# Altium PCB PCB_AIO.PcbDoc
Units mil, origin at the board's own origin, x right, y up, seen from the top; angles counter-clockwise.
Board outline 3925 x 3600.59 mil, 2 copper layers (Top Layer, Bottom Layer), stack 12.8 mil thick; 112 components, 94 nets, 470 pads, 120 vias.
Unrouted connection lines stored in the file: 86.
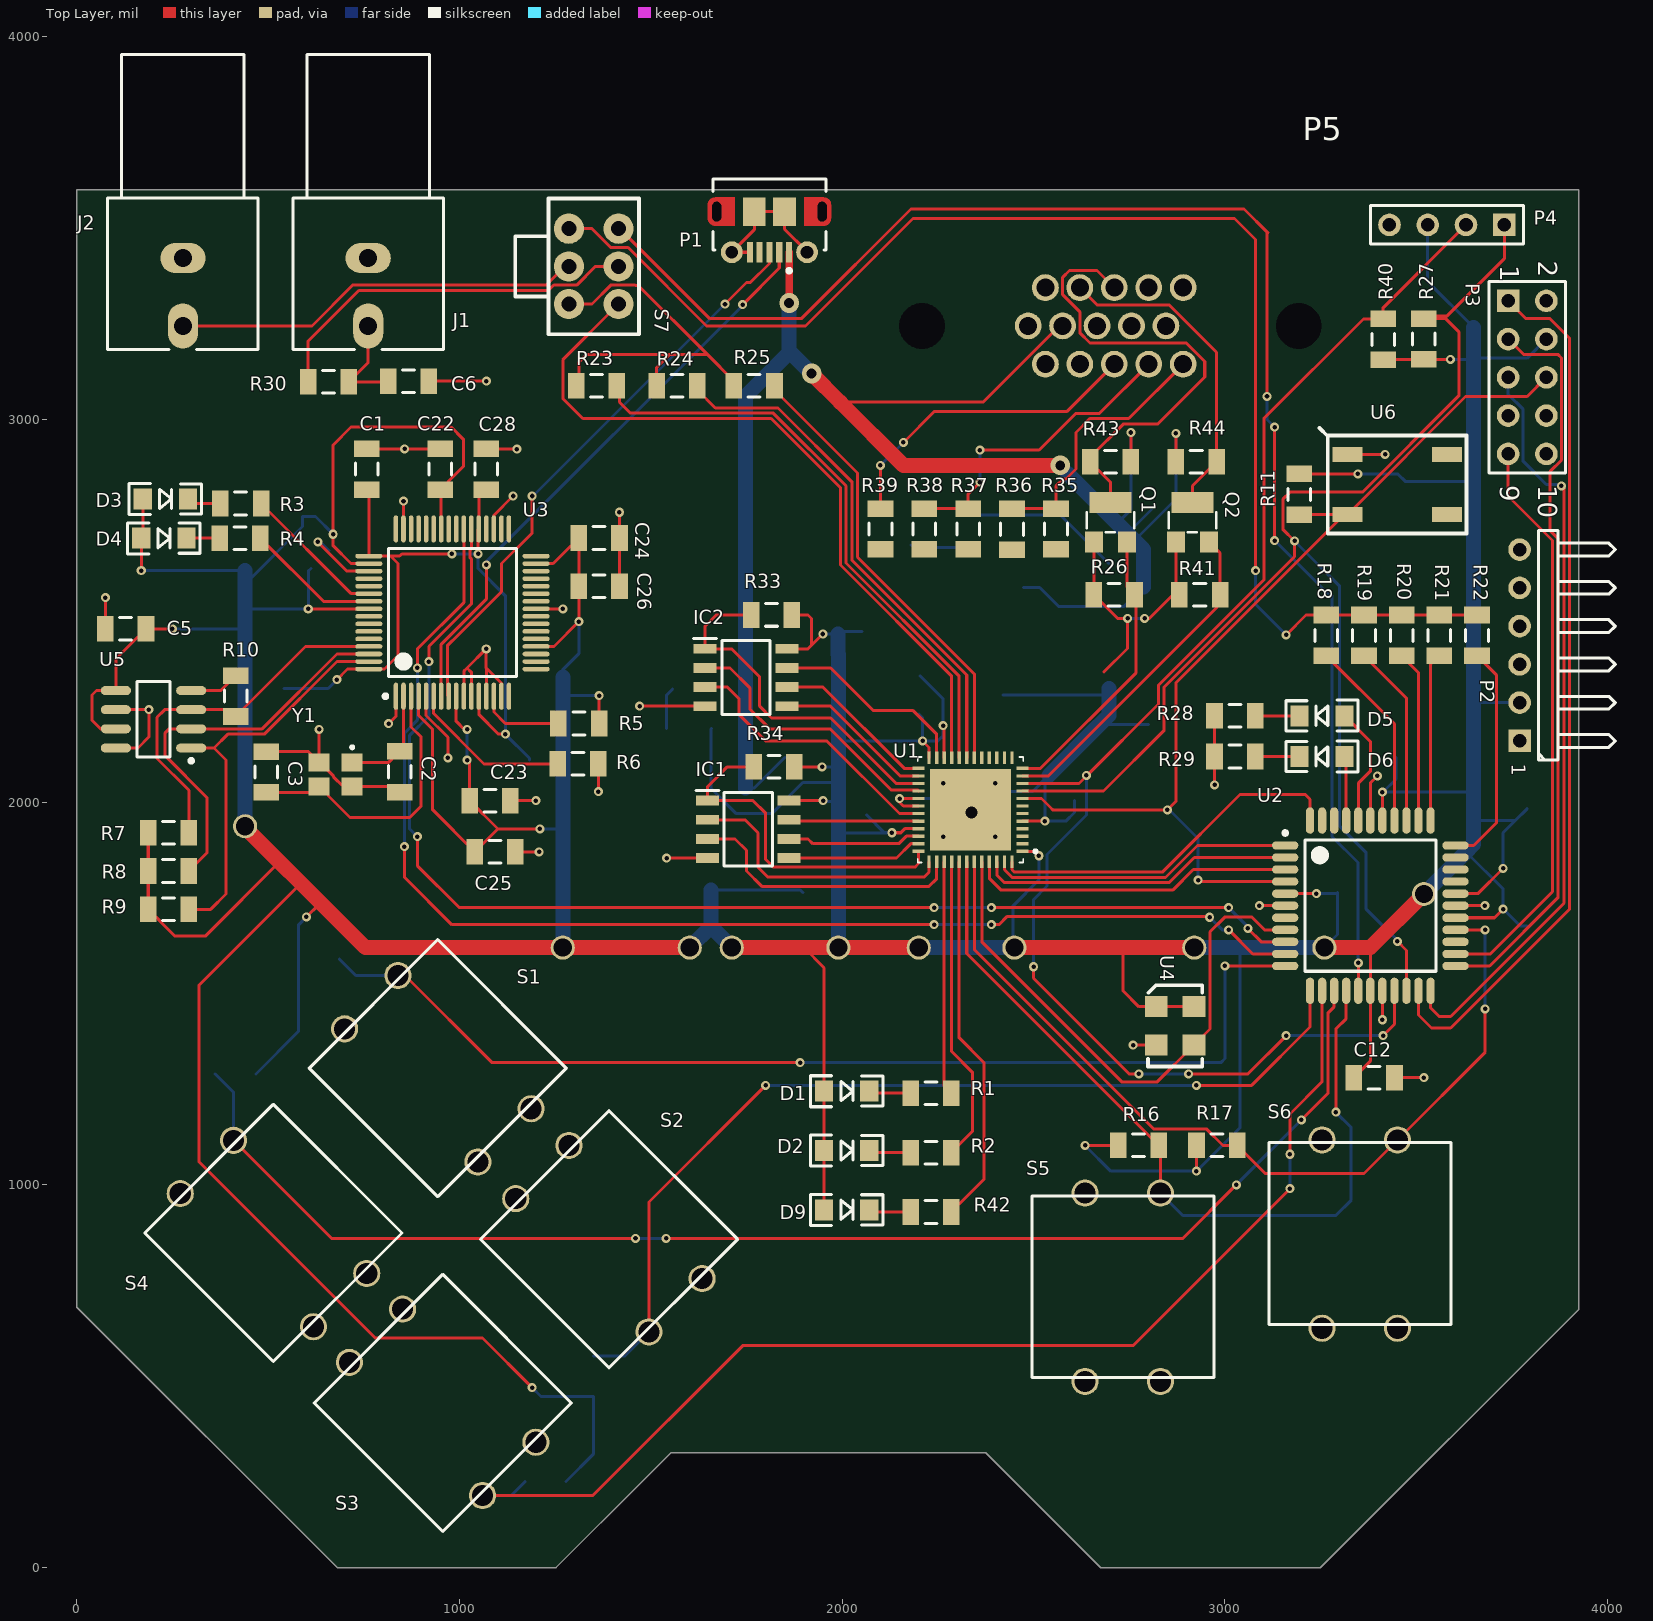
[diagram p0: Top Layer view]
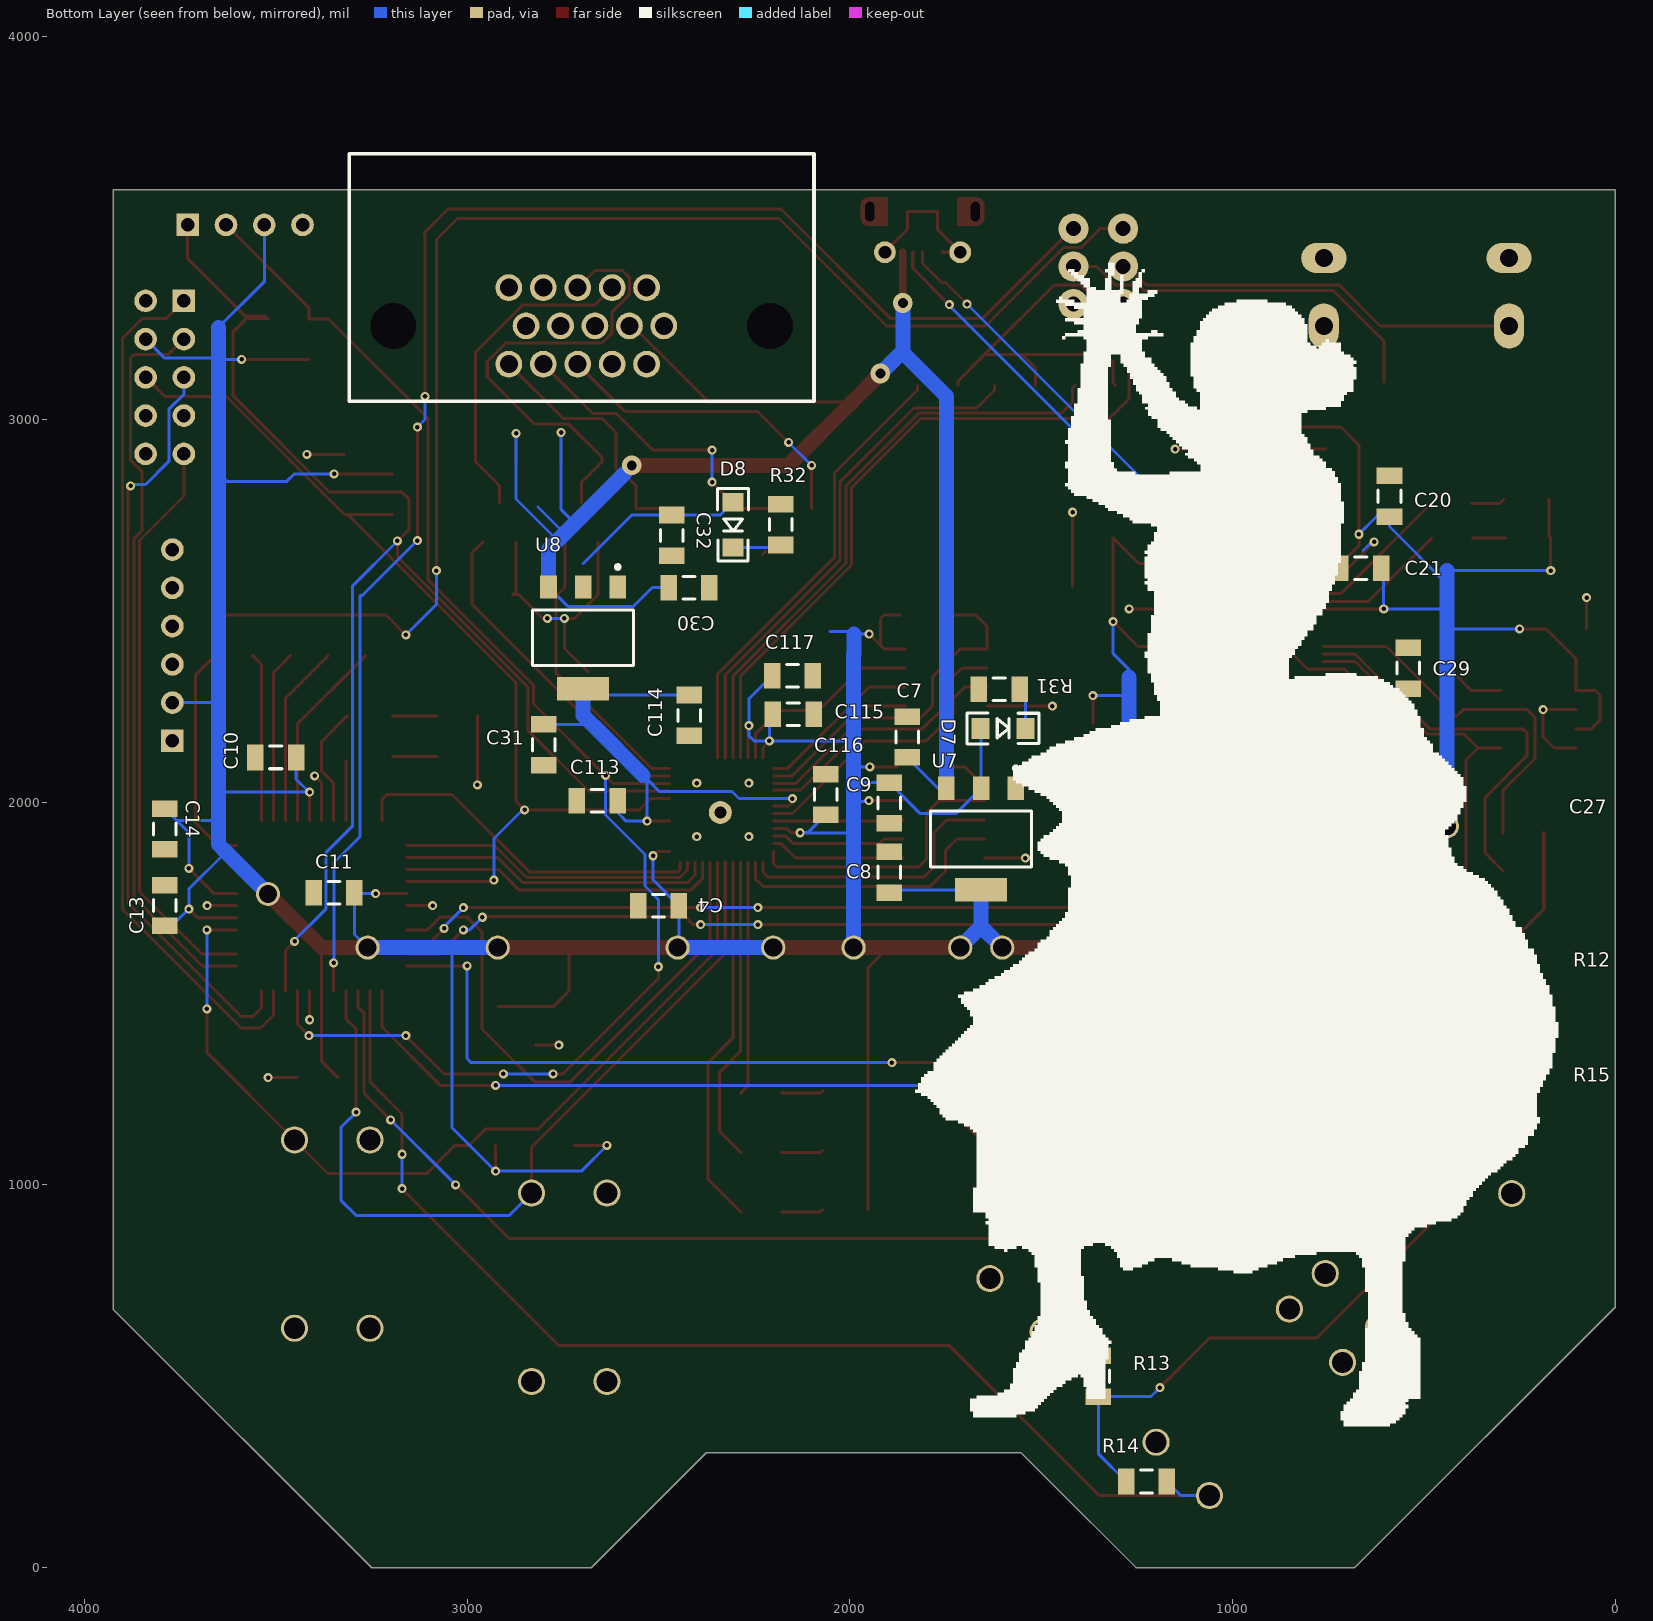
[diagram p1: Bottom Layer view, seen from below]

## Layer stack, top to bottom
Top Solder: solder mask 0.4, Solder Resist, Dk 3.5
Top Layer: signal copper 1.4
Dielectric 1: core 10, FR-4, Dk 4.2
Bottom Layer: signal copper 1.4
Bottom Solder: solder mask 0.4, Solder Resist, Dk 3.5

## Board outline
680.51,0 0,680.51 0,3600 3925,3600 3925,675 3249.41,-0.59 2675.59,-0.59 2375,300 1552.56,300 1484.25,231.69 1252.56,0
cut-out: 0,700

## Design rules (kind name [scope] priority, off if disabled: settings)
AssemblyTestpoint [All] p1: testpointundercomponent=TRUE minsize=39.37 maxsize=98.43 preferedsize=59.06 minholesize=0 maxholesize=40 preferedholesize=31.5 testpointgrid=1 usegrid=TRUE gridtolerance=0.01 allowsidetop=TRUE allowsidebottom=TRUE
Clearance [All] p1: gap=5.91 ignorepadtopadclearanceinfootprint=FALSE except(0: Arc-Hole Track-Hole SMDPad-Hole THPad-Hole Via-Hole Fill-Hole Poly-Hole Region-Hole Text-Hole; 11.81: Arc-Poly Track-Poly SMDPad-Poly THPad-Poly Via-Poly Fill-Poly Poly-Poly)
FabricationTestpoint [All] p1: side=3 testpointundercomponent=TRUE minsize=39.37 maxsize=100 preferedsize=59.06 minholesize=0 maxholesize=40 preferedholesize=31.5 testpointgrid=1 allowsidetop=TRUE allowsidebottom=TRUE usegrid=TRUE gridtolerance=0.01
HoleSize [All] p1: absolutevalues=TRUE maxlimit=157.48 minlimit=11.81 maxpercent=80.000 minpercent=20.000
HoleToHoleClearance [All] p1: gap=7.87 allowstackedmicrovias=TRUE
MinimumSolderMaskSliver [All] p1: minsoldermaskwidth=0.98
PlaneClearance [All] p1: clearance=15.75
PlaneConnect [All] p1: planeconnectstyle=Relief reliefexpansion=15.75 reliefentries=4 reliefconductorwidth=9.84 reliefairgap=7.87
PolygonConnect [All] p1: connectstyle=Relief reliefconductorwidth=9.84 reliefentries=4 polygonreliefangle="90 Angle" airgapwidth=9.84
RoutingVias [All] p1: holewidth=11.81 width=23.62 viastyle="Through Hole" minholewidth=11.81 minwidth=23.62 maxholewidth=19.68 maxwidth=39.37
SilkToSilkClearance [All] p1: silktosilkclearance=7.87
SilkToSolderMaskClearance [IsPad] p1: minsilkscreentomaskgap=1.97 clearancetoexposedcopper=TRUE
SolderMaskExpansion [All] p1: expansion=4
Width [All] p1: maxlimit=39.37 minlimit=5.91 preferedwidth=7.87
21 further rules are at their usual default settings.

## Classes and differential pairs
component class Arriquitaun2: C1 C2 C3 C5 C6 C7 C8 C9 C10 C11 C12 C13 C14 C20 C21 C22 C23 C24 C25 C26 C27 C28 C29 C30 C31 C32 C113 C114 C115 C116 C117 D3 D4 D7 D8 J1 J2 J3 P1 P2 P3 P4 R3 R4 R5 R6 R7 R8 R9 R10 R27 R30 R31 R32 R40 S7 U3 U5 U7 U8 Y1
component class Arriquitaun: C4 D1 D2 D5 D6 D9 IC1 IC2 P5 Q1 Q2 R1 R2 R11 R12 R13 R14 R15 R16 R17 R18 R19 R20 R21 R22 R23 R24 R25 R26 R28 R29 R33 R34 R35 R36 R37 R38 R39 R41 R42 R43 R44 S1 S2 S3 S4 S5 S6 U1 U2 U4 U6

## Components (designator, comment, footprint, x,y, rotation, side; value= is the part's Value field where it differs from the comment)
C1 "Cap Pol1" C1206 757.68,2870 r90 top
C2 "Cap Semi" C1206 843.74,2079.48 r270 top
C3 "Cap Semi" C1206 495.31,2078.99 r270 top
C4 "Cap Semi" C1206 2500,1729.48 r180 bottom
C5 "Cap Semi" C1206 127.8,2452.76 r0 top
C6 "Cap Semi" C1206 867.13,3100 r180 top
C7 "Cap Pol1" C1206 1850,2170 r90 bottom
C8 "Cap Pol1" C1206 1897.16,1816.97 r90 bottom
C9 "Cap Semi" C1206 1897.16,1998.07 r90 bottom
C10 "Cap Semi" C1206 3500,2116.85 r180 bottom
C11 "Cap Semi" C1206 3347.56,1763.82 r180 bottom
C12 "Cap Semi" C1206 3390,1280 r180 top
C13 "Cap Semi" C1206 3790,1730 r270 bottom
C14 "Cap Semi" C1206 3790,1930 r90 bottom
C20 "Cap Semi" C1206 590,2799.41 r270 bottom
C21 "Cap Semi" C1206 665,2610.83 r180 bottom
C22 "Cap Semi" C1206 950,2870 r270 top
C23 "Cap Semi" C1206 1080,2004.04 r180 top
C24 "Cap Semi" C1206 1365,2690.16 r180 top
C25 "Cap Semi" C1206 1093.15,1870 r180 top
C26 "Cap Semi" C1206 1365,2564.29 r180 top
C27 "Cap Semi" C1206 1130,2110 r0 bottom
C28 "Cap Semi" C1206 1070,2870 r270 top
C29 "Cap Semi" C1206 541.18,2350 r270 bottom
C30 "Cap Pol1" C1206 2420,2560.72 r180 bottom
C31 "Cap Pol1" C1206 2800,2150 r270 bottom
C32 "Cap Semi" C1206 2465,2697.13 r90 bottom
C113 "Cap Semi" C1206 2660,2004.04 r180 bottom
C114 "Cap Semi" C1206 2420,2226.85 r90 bottom
C115 "Cap Semi" C1206 2147.81,2230 r0 bottom
C116 "Cap Semi" C1206 2063.33,2020 r270 bottom
C117 "Cap Semi" C1206 2150,2330 r0 bottom
D1 "5988210107F" "1206 - LED" 2011.77,1245.19 r0 top
D2 "5988210107F" "1206 - LED" 2011.77,1090.01 r0 top
D3 "5988210107F" "1206 - LED" 231.61,2792.2 r0 top
D4 "5988210107F" "1206 - LED" 227.68,2689.84 r0 top
D5 "5988210107F" "1206 - LED" 3253.82,2225.59 r180 top
D6 "5988210107F" "1206 - LED" 3253.82,2119.3 r180 top
D7 "5988210107F" "1206 - LED" 1599.8,2192.99 r180 bottom
D8 "5988210107F" "1206 - LED" 2305,2724.61 r270 bottom
D9 "5988210107F" "1206 - LED" 2011.77,934.84 r0 top
IC1 "IS62WVS2568FBLL-20NLI" SOIC127P600X175-8N 1754.85,1929.04 r0 top
IC2 "AT25SF041-SSHD-T" SOIC127P600X175-8N 1748.46,2325.72 r0 top
J1 "RCA" RCA/4.5-H2 761.57,3578.94 r90 top
J2 "RCA" RCA/4.5-H2 277.32,3578.94 r90 top
P1 "47346-0001" USB-MICRO-B_V 1810,3490 r180 top
P2 "Header 6H" HDR1X6H 3770,2160 r90 top
P3 "Header 5X2" HDR2X5 3740,3310 r270 top
P4 "Header 4" HDR1X4 3730,3508.43 r180 top
P5 "L77HDE15SD1CO" DVI-15 2700.96,3244.45 r180 top
Q1 "BSS138P" *SOT23-W 2700.96,2731.3 r0 top
Q2 "BSS138P" *SOT23-W 2915.39,2731.3 r0 top
R1 "Res3" c1206 2231.85,1239.55 r180 top
R2 "Res3" c1206 2231.85,1084.38 r180 top
R3 "Res3" c1206 428.46,2780.39 r180 top
R4 "Res3" c1206 426.5,2689.84 r180 top
R5 "Res3" c1206 1311.85,2205.47 r180 top
R6 "Res3" c1206 1310,2100 r0 top
R7 "Res3" c1206 240,1920.08 r180 top
R8 "Res3" c1206 240,1820.08 r180 top
R9 "Res3" c1206 240,1720.08 r180 top
R10 "Res3" c1206 415,2276.97 r90 top
R11 "Res3" c1206 3194.76,2804.41 r270 top
R12 "Res3" c1206 633.11,1590 r0 bottom
R13 "Res3" c1206 1350.74,500 r90 bottom
R14 "Res3" c1206 1225,225 r180 bottom
R15 "Res3" c1206 415,1290 r180 bottom
R16 "Res3" c1206 2774.05,1103.15 r0 top
R17 "Res3" c1206 2978.88,1103.15 r0 top
R18 "Res3" c1206 3264.96,2435.83 r90 top
R19 "Res3" c1206 3363.38,2435.83 r90 top
R20 "Res3" c1206 3461.81,2435.83 r90 top
R21 "Res3" c1206 3560.24,2435.83 r90 top
R22 "Res3" c1206 3658.66,2435.83 r90 top
R23 "Res3" c1206 1358.39,3088.53 r180 top
R24 "Res3" c1206 1568.62,3088.53 r180 top
R25 "Res3" c1206 1770,3088.54 r180 top
R26 "Res3" c1206 2710.61,2542.35 r0 top
R27 "Res3" c1206 3520,3210 r90 top
R28 "Res3" c1206 3026.06,2225.6 r0 top
R29 "Res3" c1206 3026.06,2119.3 r0 top
R30 "Res3" c1206 657.85,3098.43 r0 top
R31 "Res3" c1206 1609.64,2295.35 r180 bottom
R32 "Res3" c1206 2180,2725 r270 bottom
R33 "Res3" c1206 1815.39,2489.16 r180 top
R34 "Res3" c1206 1821.77,2092.48 r180 top
R35 "Res3" c1206 2558.7,2713.89 r270 top
R36 "Res3" c1206 2443.62,2713.06 r270 top
R37 "Res3" c1206 2329.37,2713.89 r270 top
R38 "Res3" c1206 2214.71,2713.89 r270 top
R39 "Res3" c1206 2100.05,2713.89 r270 top
R40 "Res3" c1206 3413.74,3209.45 r90 top
R41 "Res3" c1206 2934.29,2542.35 r0 top
R42 "Res3" c1206 2231.85,929.21 r180 top
R43 "Res3" c1206 2700.96,2889.37 r180 top
R44 "Res3" c1206 2925.17,2889.37 r0 top
S1 "FSM100" FSM100 1187.23,1199.04 r135 top
S2 "FSM100" FSM100 1147.03,963.96 r315 top
S3 "FSM100" FSM100 712.43,536.35 r315 top
S4 "FSM100" FSM100 757.68,768.5 r135 top
S5 "FSM100" FSM100 2831.5,486.35 r90 top
S6 "FSM100" FSM100 3450.79,625.31 r90 top
S7 "STSSS2222" SWITCH 1350.74,3400 r90 top
U1 "ICE40UP5K-SG48ITR50" *QFN50P700X700X100-49N_ICE40UP5K-SG48ITR50(Primary) 2335.35,1980 r180 top
U2 "ATmega644PA-AUR" 44A_N 3380,1729.48 r0 top
U3 "FT2232HL-Tray" LQFP-64_N 981.73,2495.39 r90 top
U4 "7C-8.000MBB-T" OSCILADOR 2870,1415.47 r270 top
U5 "M93C46-WMN6P" SOP8_N 200.63,2216.54 r0 top
U6 "EVQ-Q2D01W" PUSHBUTTON 3450,2830 r0 top
U7 "LD1117S33CTR" ZZ311 1657.01,1903.58 r180 bottom
U8 "TLV117112DCYR" ZZ311 2696.85,2429.45 r180 bottom
Y1 "NX3225SA-12MHZ" NX3225SA12000MHZSTDCSR1 676.42,2072.49 r180 top

## Footprints (in the part's own frame and the unit in brackets; to place one, negate y for a bottom-side part, rotate by r counter-clockwise, add the part's x,y. Pads: shape width x height; smd on the part's side, far side on the other; paste and mask are expansions set on the pad)
44A_N [mm] "Thin QFP, 44-Leads, Body 10x10mm, Pitch 0.8mm, IPC Medium Density"
  oval 1.75x0.55 smd: 1(-5.65,4) 2(-5.65,3.2) 3(-5.65,2.4) 4(-5.65,1.6) 5(-5.65,0.8) 6(-5.65,0) 7(-5.65,-0.8) 8(-5.65,-1.6) 9(-5.65,-2.4) 10(-5.65,-3.2) 11(-5.65,-4) 23(5.65,-4) 24(5.65,-3.2) 25(5.65,-2.4) 26(5.65,-1.6) 27(5.65,-0.8) 28(5.65,0) 29(5.65,0.8) 30(5.65,1.6) 31(5.65,2.4) 32(5.65,3.2) 33(5.65,4)
  oval 0.55x1.75 smd: 12(-4,-5.65) 13(-3.2,-5.65) 14(-2.4,-5.65) 15(-1.6,-5.65) 16(-0.8,-5.65) 17(0,-5.65) 18(0.8,-5.65) 19(1.6,-5.65) 20(2.4,-5.65) 21(3.2,-5.65) 22(4,-5.65) 34(4,5.65) 35(3.2,5.65) 36(2.4,5.65) 37(1.6,5.65) 38(0.8,5.65) 39(0,5.65) 40(-0.8,5.65) 41(-1.6,5.65) 42(-2.4,5.65) 43(-3.2,5.65) 44(-4,5.65)
  silkscreen extent -5.77,-4.35 4.35,4.95, body extent -5,-5 5,5, height 1.2
"1206 - LED" [mm]
  rect 1.2x1.4 smd paste+0.2: 1(-1.5,0) 2(1.5,0)
  silkscreen extent -2.4,-1.04 2.4,1.02
*QFN50P700X700X100-49N_ICE40UP5K-SG48ITR50(Primary) [mm]
  rect 0.81x0.22 smd: 1(-3.45,2.75) 2(-3.45,2.25) 3(-3.45,1.75) 4(-3.45,1.25) 5(-3.45,0.75) 6(-3.45,0.25) 7(-3.45,-0.25) 8(-3.45,-0.75) 9(-3.45,-1.25) 10(-3.45,-1.75) 11(-3.45,-2.25) 12(-3.45,-2.75) 25(3.45,-2.75) 26(3.45,-2.25) 27(3.45,-1.75) 28(3.45,-1.25) 29(3.45,-0.75) 30(3.45,-0.25) 31(3.45,0.25) 32(3.45,0.75) 33(3.45,1.25) 34(3.45,1.75) 35(3.45,2.25) 36(3.45,2.75)
  rect 0.22x0.81 smd: 13(-2.75,-3.45) 14(-2.25,-3.45) 15(-1.75,-3.45) 16(-1.25,-3.45) 17(-0.75,-3.45) 18(-0.25,-3.45) 19(0.25,-3.45) 20(0.75,-3.45) 21(1.25,-3.45) 22(1.75,-3.45) 23(2.25,-3.45) 24(2.75,-3.45) 37(2.75,3.45) 38(2.25,3.45) 39(1.75,3.45) 40(1.25,3.45) 41(0.75,3.45) 42(0.25,3.45) 43(-0.25,3.45) 44(-0.75,3.45) 45(-1.25,3.45) 46(-1.75,3.45) 47(-2.25,3.45) 48(-2.75,3.45)
  rect 5.4x5.4 smd: EP(0,0)
  silkscreen extent -4.41,-3.5 3.5,3.5
*SOT23-W [mm]
  rect 1.2x1.4 smd: 1(-1.1,-1.3) 2(1.1,-1.3)
  rect 2.8x1.4 smd: 3(0,1.3)
  silkscreen extent -1.57,-0.66 1.57,0.66
C1206 [mm] "Chip Capacitor, Body 3.2x1.6mm, IPC High Density"
  rect 1.1x1.7 smd: 1(-1.35,0) 2(1.35,0)
  silkscreen extent -0.4,-0.75 0.4,0.75, body extent -1.7,-0.9 1.7,0.9, height 1.3
c1206 [mm] "Chip Capacitor, Body 3.2x1.6mm, IPC High Density"
  rect 1.1x1.7 smd: 1(-1.35,0) 2(1.35,0)
  silkscreen extent -0.4,-0.75 0.4,0.75, body extent -1.7,-0.9 1.7,0.9, height 1.3
DVI-15 [mil]
  round 70 hole 47: 1(-190,100) 2(-100,100) 3(-10,100) 4(80,100) 5(170,100) 6(-145,0) 7(-55,0) 8(35,0) 9(125,0) 10(215,0) 11(-190,-100) 12(-100,-100) 13(-10,-100) 14(80,-100) 15(170,-100)
  round 0 hole 120 unplated: ""(-492,0) ""(492,0)
FSM100 [mm] "Switch button"
  round 1.8 hole 1.4: 0(0,0) 1(12.5,0) 2(12.5,5) 3(0,5)
  silkscreen extent 0.25,-3.56 12.32,8.51
HDR1X4 [mm] "Connector; Header; 4 Position"
  rect 1.5x1.5 hole 0.9: 1(0,0)
  round 1.5 hole 0.9: 2(2.54,0) 3(5.08,0) 4(7.62,0)
  silkscreen extent -1.27,-1.27 8.89,1.27
HDR1X6H [mm] "Connector; Header; 6 Position; Right Angle"
  rect 1.5x1.5 hole 0.9: 1(0,0)
  round 1.5 hole 0.9: 2(2.54,0) 3(5.08,0) 4(7.62,0) 5(10.16,0) 6(12.7,0)
  silkscreen extent -1.27,-6.35 13.97,-1.27
HDR2X5 [mm] "Connector; Header; 5x2 Position"
  rect 1.5x1.5 hole 0.9: 1(0,0)
  round 1.5 hole 0.9: 2(0,2.54) 3(2.54,0) 4(2.54,2.54) 5(5.08,0) 6(5.08,2.54) 7(7.62,0) 8(7.62,2.54) 9(10.16,0) 10(10.16,2.54)
  silkscreen extent -1.27,-1.27 11.43,3.81
LQFP-64_N [mm] "Thin QFP, 64-Leads, Body 10x10mm, Pitch 0.5mm, IPC Medium Density"
  oval 1.8x0.3 smd: 1(-5.55,3.75) 2(-5.55,3.25) 3(-5.55,2.75) 4(-5.55,2.25) 5(-5.55,1.75) 6(-5.55,1.25) 7(-5.55,0.75) 8(-5.55,0.25) 9(-5.55,-0.25) 10(-5.55,-0.75) 11(-5.55,-1.25) 12(-5.55,-1.75) 13(-5.55,-2.25) 14(-5.55,-2.75) 15(-5.55,-3.25) 16(-5.55,-3.75) 33(5.55,-3.75) 34(5.55,-3.25) 35(5.55,-2.75) 36(5.55,-2.25) 37(5.55,-1.75) 38(5.55,-1.25) 39(5.55,-0.75) 40(5.55,-0.25) 41(5.55,0.25) 42(5.55,0.75) 43(5.55,1.25) 44(5.55,1.75) 45(5.55,2.25) 46(5.55,2.75) 47(5.55,3.25) 48(5.55,3.75)
  oval 0.3x1.8 smd: 17(-3.75,-5.55) 18(-3.25,-5.55) 19(-2.75,-5.55) 20(-2.25,-5.55) 21(-1.75,-5.55) 22(-1.25,-5.55) 23(-0.75,-5.55) 24(-0.25,-5.55) 25(0.25,-5.55) 26(0.75,-5.55) 27(1.25,-5.55) 28(1.75,-5.55) 29(2.25,-5.55) 30(2.75,-5.55) 31(3.25,-5.55) 32(3.75,-5.55) 49(3.75,5.55) 50(3.25,5.55) 51(2.75,5.55) 52(2.25,5.55) 53(1.75,5.55) 54(1.25,5.55) 55(0.75,5.55) 56(0.25,5.55) 57(-0.25,5.55) 58(-0.75,5.55) 59(-1.25,5.55) 60(-1.75,5.55) 61(-2.25,5.55) 62(-2.75,5.55) 63(-3.25,5.55) 64(-3.75,5.55)
  silkscreen extent -5.67,-4.25 4.25,4.57, body extent -5,-5 5,5, height 1.6
NX3225SA12000MHZSTDCSR1 [mm]
  rect 1.4x1.2 smd: 1(-1.1,-0.8) 2(1.1,-0.8) 3(1.1,0.8) 4(-1.1,0.8)
  silkscreen extent -1.2,-1.9 -1,-1.7
OSCILADOR [mm]
  rect 1.4x1.5 smd mask+0.001: 1(-1.275,-1.25) 2(1.275,-1.25) 3(1.275,1.25) 4(-1.275,1.25)
  silkscreen extent -2.7,-1.8 2.7,1.8
PUSHBUTTON [mm]
  rect 2x1 smd: 1(-3.3,2) 2(3.3,2) 3(-3.3,-2) 4(3.3,-2)
  silkscreen extent -5.15,-3.25 4.6,3.75, body extent -3.3,-3.25 3.3,3.25, height 5
RCA/4.5-H2 [mm] "Two Conductor Jack (RCA), Right Angle, Thru-Hole, Body 10 x 10 x 13 mm (WxTxH)"
  oval 2x3 hole 1.2: 1A(-4,0)
  oval 3x2 hole 1.2: 2B(-8.496,0)
  silkscreen extent -10.07,-5 9.5,5
SOIC127P600X175-8N [mm]
  rect 1.525x0.65 smd: 1(-2.712,1.905) 2(-2.712,0.635) 3(-2.712,-0.635) 4(-2.712,-1.905) 5(2.712,-1.905) 6(2.712,-0.635) 7(2.712,0.635) 8(2.712,1.905)
  silkscreen extent -3.47,-2.45 1.6,2.58, body extent -3,-2.45 3,2.45, height 1.75
SOP8_N [mm] "SOIC, 8-Leads, Body 4.9x3.9mm, Pitch 1.27mm, IPC Medium Density"
  oval 2x0.6 smd: 1(2.5,-1.905) 2(2.5,-0.635) 3(2.5,0.635) 4(2.5,1.905) 5(-2.5,1.905) 6(-2.5,0.635) 7(-2.5,-0.635) 8(-2.5,-1.905)
  silkscreen extent -1.1,-2.88 2.63,2.5, body extent -2,-2.5 2,2.5, height 1.75
SWITCH [mm]
  round 2 hole 1: 1(-2.5,1.65) 2(0,1.65) 3(2.5,1.65) 4(-2.5,-1.65) 5(0,-1.65) 6(2.5,-1.65)
  silkscreen extent -4.5,-3 4.5,5.2, body extent -4.5,-3 4.5,5, height 3.5
USB-MICRO-B_V [mm] "USB, MICRO B, Body 7.491x4.695 mm, Pitch 0.65 mm"
  rect 0.4x1.35 smd: 1(-1.3,1.35) 2(-0.65,1.35) 3(0,1.35) 4(0.65,1.35) 5(1.3,1.35)
  round 1.45 hole 0.85: 6(-2.5,1.35) 7(2.5,1.35)
  rrect50% 0x0 hole 0.6 slot 1.3 at 90 deg: 8(-3.5,-1.35) 11(3.5,-1.35)
  rect 1.5x1.9 smd: 9(-1,-1.35) 10(1,-1.35)
  Top Layer region: -3.6,-1.8 -3.6,-0.9 -4.1,-0.9 -4.1,-1.8
  Top Layer region: -2.3,-2.3 -2.3,-0.4 -3.6,-0.4 -3.6,-2.3
  Top Layer region: 3.6,-0.9 3.6,-1.8 4.1,-1.8 4.1,-0.9
  Top Layer region: 2.3,-0.4 2.3,-2.3 3.6,-2.3 3.6,-0.4
  Top Layer lines w0.5: 3.5,-0.671 ccw(c3.6,-0.9) 3.35,-0.889 ccw(c3.6,-0.9) 3.35,-0.9 ccw(c3.6,-0.9) 3.473,-1.115 ccw(c3.6,-0.9) 3.5,-1.129 ccw(c3.6,-0.9) 3.5,-0.671 ; 3.432,-1.985 cw(c3.6,-1.8) 3.35,-1.8 cw(c3.6,-1.8) 3.432,-1.985 ; -3.378,-1.015 cw(c-3.6,-0.9) -3.85,-0.9 cw(c-3.6,-0.9) -3.378,-1.015 ; -3.432,-1.985 cw(c-3.6,-1.8) -3.85,-1.8 cw(c-3.6,-1.8) -3.432,-1.985
  silkscreen extent -3.75,-3.5 3.75,2.7, body extent -4.1,-3.9 4.1,1.5, height 2.67
ZZ311 [mm] "SOT-223/SC-73; 4 Leads; Body 6.7 x 7.3 mm, inc. leads (LxW max)"
  rect 1.1x1.55 smd: 1(2.3,3.375) 2(0,3.375) 3(-2.3,3.375)
  rect 3.45x1.55 smd: 4(0,-3.375)
  silkscreen extent -3.35,-1.85 3.35,4.82

## Part data
C1 C7 C8 C30 C31: "Polarized Capacitor (Radial)"
C2 C3 C4 C5 C6 C9 C10 C11 C12 C13 C14 C20 C21 C22 C23 C24 C25 C26 C27 C28 C29 C32 C113 C114 C115 C116 C117: "Capacitor (Semiconductor SIM Model)"
D1 D2 D3 D4 D5 D6 D7 D8 D9: "LED, Rojo, Montaje Superficial, 1206 (Métrico 3216), 20 mA, 2 V, 640 nm"
IC1: "SRAM 2Mb 256Kx8 20MHz 2.2-3.6V Serial SRAM"
IC2: "Flash NOR 4Mb, 2.5-3.6V,104Mhz Serial Flash"
J1 J2: "RCA Phono Jack, Right Angle, Thru-Hole, Snap-In"
P1: "Conectores USB MICRO USB B RECPT BTTM MOUNT ASSY"
P2: "Header, 6-Pin, Right Angle"
P3: "Header, 5-Pin, Dual row"
P4: "Header, 4-Pin"
P5: "D-Sub High Density Connectors D SUB"
Q1 Q2: "MOSFET N-CH 60 V 360 mA"
R1 R2 R3 R4 R5 R6 R7 R8 R9 R10 R11 R12 R13 R14 R15 R16 R17 R18 R19 R20 R21 R22 R23 R24 R25 R26 R27 R28 R29 R30 R31 R32 R33 R34 R35 R36 R37 R38 R39 R40 R41 R42 R43 R44: "Resistor"
S1 S2 S3 S4 S5 S6: "Interruptores táctiles 12mm FLSH OFF-(ON)"
S7: "Interruptor Deslizante, DPDT, Taladro Pasante, Serie STSS2, 300 mA"
U1: "iCE40 UltraPlus 5280 LUTs 39 I/O 1.2 V Surface Mount FOPGA - QFN-48"
U2: "8-bit AVR Microcontroller, 64KB Flash, 2KB EEPROM, 4KB SRAM, 44-pin TQFP, Industrial Grade (-40°C to 85°C), Reel"
U3: "Dual High Speed USB To Multipurpose UART/FIFO IC, 64-pin LQFP, Tray"
U4: "Osciladores de reloj estándar 8 8.000MHz 3.3V50ppm(-10 +70C)"
U5: "EEPROM 1 Kbit (128 x 8) 2.5V to 5.5V EEProm"
U6: "Interruptores táctiles Switch Light Touch 6mm Square SMD"
U7: "800mA and 1A Low Dropout Positive Regulator 2.85V, 3.3V, 5V, and Adjustable"
U8: "Reguladores de voltaje LDO 1A + Fixed Vltg Lo-Drpout Linear Reg"
Y1: library part NX3225SA-12MHZ-STD-CSR-3, "Crystal or Oscillator"

## Free pads (board coordinates)
  round 62.99 hole 47.24: 2(440,1937.05) 2(1270,1620) 2(1601.81,1620) 2(1711.57,1620) 2(1990,1620) 2(2200,1620) 2(2450,1620) 2(2920,1620) 2(3260,1620) 2(3520,1760)
  round 60 hole 31.5: 3(2338.39,1973.11)

## Via types
v1: diameter 23.62, hole 11.81, Top Layer to Bottom Layer, 117 vias
v2: diameter 51.18, hole 25.59, Top Layer to Bottom Layer, 3 vias

## Nets (pads, with @x,y where several pads share a name; then routed paths per layer and width w, separated by ;. In a path a pad name is that pad's centre, name@x,y a point inside that pad or via, vN(x,y) a via of type N, cw(c..) or ccw(c..) an arc to the next point about the centre after c; other vN are vias at no path point)
/CS_FLASH: IC2.1 R33.2 U1.27 | length 940.1
  Top Layer w7.87: R33.2 1670.85,2489.16 1641.69,2460 IC2.1 1710.66,2400.72 1784.41,2326.97 1784.41,2250.72 1815.13,2220 1970,2220 2141.1,2048.9 U1.27
/CS_RAM: IC1.1 R34.2 U1.36 | length 909.3
  Top Layer w7.87: R34.2 1700,2092.48 1648.07,2040.55 IC1.1 1767.15,2004.04 1800,1971.19 1800,1850 1820,1830 2190,1830 2199.53,1839.53 U1.36
/SS: U1.48 U2.44 | length 947
  Top Layer w7.87: U1.48 2443.62,1823.46 2450,1817.09 2836.57,1817.09 3039.49,2020 3210,2020 3222.52,2007.48 U2.44
AUDIO: R30.1 S7.5 | length 998.7
  Top Layer w7.87: R30.1 604.7,3204.7 737.01,3337.01 1232.13,3337.01 1246.52,3351.4 1264.78,3351.4 1265.4,3350.79 1306.17,3350.79 1355.38,3400 S7.5
AUDIO_FPGA: S7.4 U1.21 | length 1955.3
  Top Layer w7.87: S7.4 1270,3155.87 1270,3054.73 1322.29,3002.44 1814.51,3002.44 1995.37,2821.59 1995.37,2619.9 2286.14,2329.13 U1.21
AUDIO_UC: S7.6 U2.16 | length 4025.4
  Top Layer w7.87: S7.6 1419.04,3498.43 1654.31,3263.15 1893.15,3263.15 2180,3550 3050,3550 3112.16,3487.84 3110,3485.69 v1(3110,3060) ; v1(3130,2683.62) v1(3130,2980) ; U2.16 v1(3348.5,1580)
  Bottom Layer w7.87: v1(3110,3060) 3110,3000 v1(3130,2980) ; v1(3130,2683.62) 3273.62,2540 3280,2540 3280,1910 3347.56,1842.44 3347.56,1587.56 v1@3340,1580
BTN1: R12.2 S1.1 U2.11 | length 2829.8
  Top Layer w7.87: S1.1 857.89,1547.02 1085.59,1319.33 v1(1890.28,1319.33) ; v1(3000,1572) U2.11
  Bottom Layer w7.87: R12.2 729.24,1547.02 S1.1 ; v1(1890.28,1319.33) 2989.33,1319.33 3000,1330 v1(3000,1572)
BTN2: R13.2 S2.1 U2.12 | length 2520.9
  Top Layer w7.87: S2.1 1495.01,955.01 v1(1800,1260) ; v1(2925.73,1260) 3070,1260 3222.52,1412.52 U2.12
  Bottom Layer w7.87: R13.2 1432.19,553.15 S2.1 ; v1(1800,1260) v1(2925.73,1260)
BTN3: R14.2 S3.1 U2.13 | length 3120.1
  Top Layer w7.87: S3.1 1348.36,188.36 1740,580 2760,580 v1(3170,990) ; v1(3170,1080) 3170,1185.24 3254.02,1269.25 U2.13
  Bottom Layer w7.87: S3.1 1135.21,188.36 R14.2 ; v1(3170,990) v1(3170,1080)
BTN4: R15.2 S4.1 U2.14 | length 3600.7
  Top Layer w7.87: S4.1 666.18,860 v1(1460,860) ; v1(1540,860) 2890,860 v1(3030,1000) ; v1(3200,1170) 3270,1240 3270,1450 3285.51,1465.51 U2.14
  Bottom Layer w7.87: R15.2 409.69,1242.16 S4.1 ; v1(1460,860) v1(1540,860) ; v1@3030,990 v1(3030,1000) v1(3200,1170)
BTN5: R16.2 S5.1 U1.42 U2.15 | length 2189.4
  Top Layer w7.87: U1.42 2325.51,1604.84 R16.2 2831.5,1098.85 S5.1 ; v1(3290,1190) 3290,1407.13 3317.01,1434.13 U2.15
  Bottom Layer w7.87: S5.1 2889.97,920 3290,920 3330,960 3330,1150 v1(3290,1190)
BTN6: R17.2 S6.1 U1.43 U2.26 | length 2335
  Top Layer w7.87: U1.43 2345.2,1614.8 2813.54,1146.46 2951.46,1146.46 2994.77,1103.15 R17.2 3105.18,1030 3363.36,1030 S6.1 3680,1346.64 v1(3680,1460) ; U2.26 v1(3680,1666.49)
  Bottom Layer w7.87: v1(3680,1460) v1(3680,1666.49)
CLK_16.000MHZ: U1.44 U2.8 U4.3 | length 1494.5
  Top Layer w7.87: U1.44 2364.88,1635.12 2731.65,1268.35 2822.28,1268.35 U4.3 2961.34,1407.4 2961.34,1661.34 2999.33,1699.33 3070.67,1699.33 3103.51,1666.49 U2.8
D+: P1.3 U3.8 | length 1517.6
  Top Layer w7.87: U3.8 968.35,2280.43 968.35,2408.97 981.03,2421.65 981.65,2421.65 1110,2550 1110,2623.34 1190,2703.34 v1(1190,2800) ; v1(1693.86,3301.57) 1750,3357.72 1759.96,3357.72 1810,3407.76 P1.3
  Bottom Layer w7.87: v1(1190,2800) 1192.28,2800 v1(1693.86,3301.57)
D-: P1.2 U3.7 | length 1525.9
  Top Layer w7.87: U3.7 952.2,2412.31 1070.31,2530.42 v1(1070.31,2620) ; v1(1740,3300) 1835.59,3395.59 P1.2
  Bottom Layer w7.87: v1(1070.31,2620) 1070.31,2628.11 1740,3297.8 v1(1740,3300)
DGND: C1.2 C2.2 C3.1 C4.1 C5.1 C6.1 C7.2 C8.2 C9.1 C10.1 C11.1 C12.1 C13.1 C14.1 C20.1 C21.1 C22.1 C23.1 C24.1 C25.1 C26.1 C27.1 C28.1 C29.1 C30.2 C31.2 C32.1 C113.1 C114.1 C115.1 C116.1 C117.1 IC1.4 IC2.4 J1.1A J2.1A P1.5 P1.6 P1.7 P1.8 P1.9 P1.10 P1.11 P2.1 P3.2 P3.10 P4.4 P5.5 P5.6 P5.7 P5.8 P5.10 pad.3 R6.2 R28.1 R29.1 R31.1 R32.1 S1.2 S2.2 S3.2 S4.2 S5.2 S6.2 U1.EP U2.6 U2.18 U2.28 U2.39 U3.1 U3.5 U3.10 U3.11 U3.13 U3.15 U3.25 U3.35 U3.47 U3.51 U4.2 U5.6 U5.8 U6.1 U7.1 U8.1 Y1.2 Y1.4 | length 4216.3
  Top Layer w7.87: C5.1 v1(74.65,2534.65) ; U5.8 160,2141.54 188.46,2170 v1(188.46,2241.54) U5.6 ; C3.1 604.96,2132.14 Y1.2 ; v1(630,2680) 706.34,2603.66 U3.51 ; v1(633.11,2190) Y1.2 ; C1.2 856.93,2923.15 C22.1 ; v1(815.09,2205.47) 834.09,2224.47 U3.1 ; C2.2 829.08,2041 Y1.4 696.1,2041 670.51,2066.59 670.51,2068.69 635.22,2103.99 Y1.2 ; U3.47 v1(853.78,2786.85) ; U3.5 912.83,2226.65 970,2169.49 v1(970,2115.83) ; C6.1 v1(1070.31,3100) ; U3.10 1011.26,2341.98 1020,2350.72 ; U3.11 1030.94,2339.78 1020,2350.72 ; U3.13 1070.31,2350.41 ; C28.1@1070.31,2922.52 v1(1150,2922.52) ; U3.35 1090,2750 v1(1140,2800) ; U3.15 1109.68,2311.04 1070.31,2350.41 ; C23.1 v1(1199.61,2004.04) ; C25.1 v1(1208.27,1870) ; U3.25 v1(1270,2505.23) ; v1(1363.15,2027.69) R6.2 ; C26.1@1418.15,2564.29 C24.1 v1(1418.15,2757.55) ; v1(1470.72,2250.72) IC2.4 ; v1(1541.43,1854.04) IC1.4 ; P1.5 P1.7 1770.63,3495.91 P1.10 P1.9 1849.37,3497.03 1908.43,3437.97 P1.6 ; v1(2760,1365.27) U4.2 ; v1(2972.91,2045.41) R29.1 R28.1 ; v1(3090.11,1729.48) U2.6 ; U6.1 v1(3418.74,2908.74) ; U2.39 3380,2050 v1(3398.58,2068.58) ; v1(3411.5,1431.5) U2.18 ; C12.1 v1(3520,1280) ; U2.28 v1(3679.48,1729.48) ; 1020,2350.72 v1(1070,2400.72) 1070,2350.72 1070.31,2350.41
  Bottom Layer w7.87: v1(630,2680) 636.41,2680 658.93,2657.48
  other v1: 2263.76,1910 2400,1910 2263.76,2050 2400,2050 856.93,2923.15
EECLK: R8.1 U3.62 U5.2 | length 1043.9
  Top Layer w7.87: R8.1 340,1866.93 340,2012.48 230,2122.48 230,2180 241.54,2191.54 U5.2 484.42,2191.54 680,2387.12 U3.62
EECS: R9.1 U3.63 U5.1 | length 1065.6
  Top Layer w7.87: R9.1 349.92,1720.08 390,1760.16 390,2110 358.46,2141.54 ; U5.1 358.46,2141.54 ; U3.63 679.8,2367.44 490.12,2177.76 394.68,2177.76 358.46,2141.54
EEDATA: R7.1 R10.1 U3.61 U5.3 | length 980.7
  Top Layer w7.87: R7.1 293.15,2030.84 210,2113.99 210,2221.85 229.69,2241.54 U5.3 397.28,2241.54 R10.1 597.99,2406.81 U3.61
FLASH_MISO1: IC2.2 U1.28 | length 723.5
  Top Layer w7.87: IC2.2 1707.03,2350.72 1758.82,2298.93 1758.82,2243.42 1810.7,2191.54 1968.46,2191.54 2128.82,2031.18 2197.56,2031.18 U1.28
FLASH_MISO2: IC2.3 U1.31 | length 718.6
  Top Layer w7.87: IC2.3 1700,2300.72 1730,2270.72 1730,2230 1800,2160 1960,2160 2149.84,1970.16 U1.31
FLASH_MISO3: IC2.7 U1.23 | length 525
  Top Layer w7.87: IC2.7 1970,2350.72 2080.72,2240 2184.27,2240 2246.77,2177.5 U1.23
FLASH_MOSI: IC2.5 U1.26 | length 419.7
  Top Layer w7.87: IC2.5 1969.28,2250.72 2151.42,2068.58 U1.26
FLASH_SCK: IC2.6 U1.25 | length 432.3
  Top Layer w7.87: IC2.6 1949.42,2300.72 2161.87,2088.27 U1.25
FPGA_HSYNC: Q1.2 R26.2 U1.12 | length 751.5
  Top Layer w7.87: U1.12 2518.27,2088.27 2767.2,2337.2 2767.2,2538.91 R26.2 2744.27,2561.84 Q1.2
FPGA_VSYNC: Q2.2 R41.2 U1.11 | length 876.8
  Top Layer w7.87: U1.11 2538.58,2068.58 2987.44,2517.44 R41.2 2987.44,2651.38 Q2.2
LED1: D5.1 U2.40 | length 314.5
  Top Layer w7.87: D5.1 3380,2158.47 3380,2080.62 3348.5,2049.13 U2.40
LED2: D6.1 U2.41 | length 157.4
  Top Layer w7.87: U2.41 D6.1@3317.01,2109.34
LED3: R1.1 U1.39 | length 612.3
  Top Layer w7.87: U1.39 2266.46,1258.09 R1.1
LED4: R2.1 U1.40 | length 804.9
  Top Layer w7.87: R2.1 2340,1139.39 2340,1294.57 2286.14,1348.43 U1.40
LED5: R42.1 U1.41 | length 976.8
  Top Layer w7.87: R42.1 2370,1014.22 2370,1320 2305.83,1384.17 U1.41
NetC6_2: C6.2 J1.2B R30.2 | length 270.6
  Top Layer w7.87: J1.2B 761.57,3148.99 R30.2 812.4,3098.43 C6.2
NetD1_2: D1.2 R1.2 | length 110.2
  Top Layer w7.87: D1.2 2076.46,1239.55 R1.2
NetD2_2: D2.2 R2.2 | length 110.2
  Top Layer w7.87: D2.2 2076.45,1084.38 R2.2
NetD3_2: D3.2 R3.2 | length 89.5
  Top Layer w7.87: D3.2 302.48,2780.39 R3.2
NetD4_2: D4.2 R4.2 | length 86.6
  Top Layer w7.87: D4.2 R4.2
NetD5_2: D5.2 R28.2 | length 115.6
  Top Layer w7.87: R28.2 D5.2
NetD6_2: D6.2 R29.2 | length 115.6
  Top Layer w7.87: R29.2 D6.2
NetD7_2: D7.2 R31.2 | length 108.9
  Bottom Layer w7.87: D7.2 1540.75,2279.61 R31.2
NetD8_2: D8.2 R32.2 | length 127.6
  Bottom Layer w7.87: R32.2 2186.3,2665.55 D8.2
NetD9_2: D9.2 R42.2 | length 110.2
  Top Layer w7.87: D9.2 2076.45,929.21 R42.2
NetR3_1: R3.1 U3.54 | length 379.3
  Top Layer w7.87: R3.1 717.41,2544.6 U3.54
NetR4_1: R4.1 U3.55 | length 351.9
  Top Layer w7.87: R4.1 644.57,2524.92 U3.55
NetR5_2: R5.2 U3.14 | length 222.5
  Top Layer w7.87: U3.14 1090,2235.47 1120,2205.47 R5.2
NetR6_1: R6.1 U3.6 | length 424.2
  Top Layer w7.87: U3.6 932.52,2231.47 1063.99,2100 R6.1
NetR10_2: R10.2 U5.4 | length 131.9
  Top Layer w7.87: U5.4 376.42,2291.54 R10.2
NRST: P3.6 R11.2 U1.8 U2.4 U6.3 | length 2603
  Top Layer w7.87: U1.8 2520.56,2009.53 2544.18,1985.91 2550.11,1980 v1(2850,1980) 2872.09,2002.09 2872.09,2312.2 U6.3@3311.15,2751.26 ; v1(2930,1796.37) 2933.89,1792.47 U2.4 ; R11.2 U6.3@3311.15,2751.26 ; P3.6 3790,3060 3628.82,3060 U6.3 U6.3@3311.15,2751.26
  Bottom Layer w7.87: v1(2850,1980) 2850,1984.97 2930,1904.97 v1(2930,1796.37)
OSCI: C2.1 U3.2 Y1.1 | length 284.3
  Top Layer w7.87: Y1.1 815.09,2103.99 C2.1 853.78,2142.67 U3.2
OSCO: C3.2 U3.3 Y1.3 | length 754.8
  Top Layer w7.87: C3.2 617.95,2025.84 Y1.3 714.1,1960 870,1960 900,1990 900,2170 873.46,2196.54 U3.3
RAM_MISO1: IC1.2 U1.37 | length 726.4
  Top Layer w7.87: IC1.2 1745.96,1954.04 1780,1920 1780,1830.08 1806.09,1803.99 2213.99,1803.99 2227.09,1817.09 U1.37
RAM_MISO2: IC1.3 U1.38 | length 734.4
  Top Layer w7.87: IC1.3 1720,1904.04 1750,1874.04 1750,1820 1790,1780 2227.09,1780 2246.77,1799.68 U1.38
RAM_MISO3: IC1.7 U1.32 | length 339.4
  Top Layer w7.87: IC1.7 1865.18,1950.47 U1.32
RAM_MOSI: IC1.5 U1.35 | length 353.4
  Top Layer w7.87: IC1.5 2141.85,1854.04 2179.23,1891.42 U1.35
RAM_SCK: IC1.6 U1.34 | length 351.3
  Top Layer w7.87: IC1.6 1910.84,1904.04 1923.45,1891.42 2147.81,1891.42 2167.5,1911.1 U1.34
RX: U2.10 U3.39 | length 3377.6
  Top Layer w7.87: v1(856.22,1883.78) 856.22,1803.78 980,1680 v1(2240,1680) ; v1(890,2350.72) 890,2400 1011.26,2521.26 U3.39 ; v1(2390,1680) 2410,1680 2431.65,1701.65 2957.67,1701.65 v1(2960,1699.33) v1@2960,1698.32 ; v1(3010,1666.49) 3072.99,1603.5 U2.10
  Bottom Layer w7.87: v1(856.22,1883.78) 856.22,2180.31 890,2214.09 v1(890,2350.72) ; v1(2240,1680) v1(2390,1680) ; v1(2960,1699.33) 2992.83,1666.49 v1(3010,1666.49)
SCK: U1.45 U2.3 | length 851.3
  Top Layer w7.87: U1.45 2384.57,1801.03 2415.6,1770 2863.65,1770 2917.62,1823.97 U2.3
SCL: P4.2 R40.2 U1.10 U2.19 | length 3832.2
  Top Layer w7.87: U1.10 2618.9,2048.9 2638.35,2068.35 v1(2638.35,2070) 2640,2070 2826.5,2256.5 2826.5,2305.59 3101.65,2580.74 3101.65,3002.28 3361.98,3262.6 R40.2 3413.74,3292.17 P4.2 ; v1(2500,1570) 2500,1540 2750,1290 v1(2775.13,1290) ; v1(2905,1290) 3060,1290 v1(3160,1390) ; v1(3413.18,1390) 3442.99,1419.81 U2.19
  Bottom Layer w7.87: v1(2500,1570) 2500,1745.37 2535.39,1780.76 2535.39,1863.54 2638.35,1966.49 v1(2638.35,2070) ; v1(2775.13,1290) v1(2905,1290) ; v1(3160,1390) v1(3413.18,1390)
SDA: P4.1 R27.2 U1.9 U2.20 | length 3701.1
  Top Layer w7.87: U1.9 2682.97,2029.21 2840.28,2186.52 2840.28,2299.88 3182,2641.6 v1(3182,2682.51) 3151.46,2713.06 3151.46,2791.46 3170,2810 3359.33,2810 3611.1,3061.77 3611.1,3228.9 3576.85,3263.15 R27.2 3526.85,3270 3580,3270 3730,3420 P4.1 ; v1(3450.79,1636.34) 3474.49,1612.64 U2.20
  Bottom Layer w7.87: v1(3182,2682.51) 3300,2564.51 3300,1937.05 3369.21,1867.83 3369.21,1720.51 3453.39,1636.34 v1(3450.79,1636.34)
TCK: P2.4 U1.3 U3.16
TCK_UC: P3.1 U2.21 | length 2293.3
  Top Layer w7.87: U2.21 3505.98,1444.02 3540,1410 3590,1410 3901.02,1721.02 3901.02,3211.58 3849.45,3263.15 3786.85,3263.15 P3.1
TDI: P2.5 U1.4 U3.17
TDI_UC: P3.9 U2.24 | length 1513.1
  Top Layer w7.87: U2.24 3693.5,1603.5 3856.22,1766.22 3856.22,2683.78 3740,2800 P3.9
TDO: P2.6 U1.6 U3.18
TDO_UC: P3.3 U2.23 | length 1932.2
  Top Layer w7.87: U2.23 3692,1572 3870,1750 3870,2689.49 3850,2709.49 3850,2864.32 3879.37,2893.69 3879.37,3160.63 3870,3170 3780,3170 P3.3
TMS: P2.3 U1.2 U3.19
TMS_UC: P3.5 U2.22 | length 1980.6
  Top Layer w7.87: U2.22 3537.48,1462.52 3560,1440 3590,1440 3886.22,1736.22 3886.22,2819.59 v1(3879.37,2826.44)
  Bottom Layer w7.87: P3.5 3740,3065.68 3779.37,3026.31 3779.37,2890.63 3840,2830 3875.81,2830 v1(3879.37,2826.44)
TX: U2.9 U3.38 | length 3310.5
  Top Layer w7.87: v1(890,1910) 890,1834.22 999.95,1724.27 v1(2240,1724.27) ; v1(920.28,2367.44) 920.28,2407.08 1030.94,2517.75 1030.94,2635.75 1027.01,2639.69 1027.01,2657.63 1030.94,2661.57 U3.38 ; v1(2390,1724.27) v1(3010,1724.27) ; v1(3060,1670) 3095.01,1634.99 U2.9
  Bottom Layer w7.87: v1(890,1910) 870,1930 870,2174.61 920.28,2224.89 v1(920.28,2367.44) ; v1(2240,1724.27) v1(2390,1724.27) ; v1(3010,1724.27) 3060,1674.27 v1(3060,1670)
UC_MISO: U1.46 U2.2 | length 823.5
  Top Layer w7.87: U1.46 2404.25,1809.69 2424.41,1789.53 2854.06,1789.53 2920,1855.47 U2.2
UC_MOSI: U1.47 U2.1 | length 797.2
  Top Layer w7.87: U1.47 2423.94,1823.66 2444.29,1803.31 2844.65,1803.31 2928.3,1886.96 U2.1
VCC_1.8V: C1.1 C27.2 C28.2 C29.2 U3.12 U3.37 U3.49 U3.64 | length 1978.1
  Top Layer w7.87: v1(680,2320) 707.75,2347.75 U3.64 804.31,2347.75 839.69,2383.12 839.69,2623.34 820,2643.03 ; C1.1 763.23,2811.3 U3.49 820,2643.03 ; v1(980,2648.66) 849.37,2648.66 843.74,2643.03 820,2643.03 ; v1(1048.66,2648.66) 1048.66,2711.92 U3.37 1050.63,2797.48 C28.2 ; U3.12 1050.63,2229.37 1102.24,2177.76 v1(1120,2177.76) v1@1120,2180
  Bottom Layer w7.87: C29.2 656.85,2296.85 v1(680,2320) ; v1(980,2648.66) v1(1048.66,2648.66) 1048.66,2611.03 1120,2539.69 v1(1120,2177.76) 1183.15,2114.61 C27.2
VCC_5V: C7.1 C30.1 P1.1 P5.9 R43.1 R44.1 U7.3 U8.3 | length 4634.9
  Top Layer w7.87: 1995,3045 2368.1,3045 2567.55,3244.45 P5.9 ; R43.1 v1(2754.11,2965.89) ; R44.1 v1(2872.02,2963.86)
  Top Layer w19.68: v2(1861.18,3304.37) P1.1
  Top Layer w39.37: v2(1920,3120) 1995,3045 2160,2880 v2(2570,2880)
  Bottom Layer w7.87: U7.3 1769.61,2036.46 C7.1 ; C30.1 2516.13,2560.72 2565,2511.85 2736.93,2511.85 U8.3 ; 2720,2730 2754.11,2764.11 v1(2754.11,2965.89) ; 2745.55,2701.85 2815,2771.3 ; 2763.7,2683.7 2872.02,2792.02 v1(2872.02,2963.86)
  Bottom Layer w39.37: U7.3 1747.56,3060.55 1861.18,3174.17 ; v2(1861.18,3304.37) 1861.18,3178.82 v2(1920,3120) ; 2587.4,2860 2745.55,2701.85 2763.7,2683.7 2787.4,2660 U8.3
VDD_1.2V: C31.1 C32.2 C113.2 C114.2 D8.1 U1.5 U1.29 U1.30 U8.2 U8.4 | length 1973.5
  Top Layer w7.87: U1.30 2159.69,1989.84 2150,1999.53 v1(2150,2009.53) U1.29 ; U1.5 v1(2529.53,1950.47)
  Bottom Layer w7.87: v1(2150,2009.53) 2289.53,2009.53 2307.69,2027.69 2497.69,2027.69 2529.53,2059.53 ; D8.1 2338.39,2750.28 C32.2 2570,2750.28 2696.85,2623.43 ; C114.2 2680.28,2280 U8.4 ; 2540,2070 2529.53,2059.53 ; C113.2 2606.85,1973.11 2584.21,1950.47 v1(2529.53,1950.47) 2529.53,2059.53 ; 2670,2200 2673.15,2203.15 C31.1
  Bottom Layer w39.37: 2540,2070 2670,2200 ; 2673.15,2203.15 2696.85,2226.85 U8.4
VDD_3.3V: C4.2 C5.2 C8.1 C9.2 C10.2 C11.2 C12.2 C13.2 C14.2 C20.2 C21.2 C22.2 C23.2 C24.2 C25.2 C26.2 C115.2 C116.2 C117.2 D1.1 D2.1 D3.1 D4.1 D7.1 D9.1 IC1.8 IC2.8 P2.2 P3.4 P4.3 pad.2 Q1.1 Q2.1 R5.1 R7.2 R8.2 R9.2 R11.1 R12.1 R13.1 R14.1 R15.1 R16.1 R17.1 R26.1 R27.1 R33.1 R34.1 R40.1 R41.1 U1.1 U1.22 U1.24 U1.33 U2.5 U2.17 U2.27 U2.29 U2.38 U3.4 U3.9 U3.20 U3.31 U3.42 U3.50 U3.56 U4.1 U4.4 U5.5 U5.7 U7.2 U7.4 | length 24355.8
  Top Layer w7.87: U5.7 62.28,2191.54 40,2213.82 40,2280 51.54,2291.54 U5.5 102.2,2374.01 C5.2 v1(250,2452.76) ; v1(168.62,2605.03) D4.1 172.56,2693.78 D3.1 ; R7.2 R8.2 R9.2 256.93,1650 335.96,1650 530,1844.04 ; 586.01,1788.03 320,1522.02 320,1060 780,600 1060,600 v1(1190,470) ; v1(600,1700) 632.02,1732.02 642.02,1732.02 ; v1@604.77,2505.23 v1(604.96,2505.23) U3.56 ; U3.50 716.66,2623.34 670,2670 v1(670,2700) 670,2933.34 716.66,2980 978.53,2980 1010,2948.53 1010,2876.85 C22.2 C22.2@952.2,2814.65 ; U3.4 893.15,2226.85 930,2190 930,1980 C25.2 1100,1930 1100.89,1930 ; U3.42 C22.2@952.2,2814.65 ; C22.2@952.2,2816.85 C22.2@952.2,2814.65 ; U3.9 991.57,2211.22 1012.8,2190 v1(1020,2190) ; v1(1020,2110) 1026.85,2103.15 C23.2 1100.89,1930 ; U3.20 1246.81,2406.81 v1(1311.85,2471.85) C26.2 C24.2 1245.03,2623.34 U3.31 ; v1(1210,1930) 1100.89,1930 ; R5.1 v1(1365,2278.15) ; IC2.8 1910.72,2400.72 1920,2410 ; IC1.8 v1(1950.33,2004.04) ; R33.1 1910.84,2489.16 1920,2480 1920,2410 ; R34.1 v1(1947.8,2092.48) ; 1900,1620 1952.72,1567.28 D1.1 D2.1 D9.1 ; v1(1949.42,2439.42) 1920,2410 ; v1(2130,1920.08) 2153.1,1920.08 2163.81,1930.79 U1.33 ; v1(2210,2160) 2227.09,2142.91 U1.24 ; v1(2263.76,2200) 2266.46,2197.3 U1.22 ; U1.1 2502,1871.73 v1(2513.73,1860) ; 2550,1620 2556.85,1626.85 ; v1(2634.65,1103.15) R16.1 ; Q1.1 2657.66,2542.55 R26.1 2719.81,2480 v1(2745.55,2480) 2745.55,2401.79 2683.76,2340 ; 2733.76,1620 2733.76,1507.04 2775.13,1465.67 U4.1 U4.4 ; v1(2790,2480) 2802.49,2480 2864.84,2542.35 R41.1 2872.09,2551.41 Q2.1 ; v1(2925.73,1035.73) R17.1 ; U2.5 v1(3239.02,1760.98) ; R11.1 v1(3347.56,2857.56) ; C12.2 3380,1323.15 U2.17 3380,1620 ; U2.38 v1(3411.5,2026.33) ; R40.1 3519.45,3156.3 R27.1 v1(3589.45,3156.85) ; U2.27 3704.31,1697.99 v1(3727.05,1720.72) ; U2.29 3660.98,1760.98 v1(3726.85,1826.85)
  Top Layer w39.37: pad.2@440,1934.04 530,1844.04 586.01,1788.03 642.02,1732.02 754.04,1620 1270,1620 pad.2@1601.81,1620 ; pad.2@1711.57,1620 1900,1620 1990,1620 pad.2@2200,1620 ; pad.2@2450,1620 2550,1620 2733.76,1620 pad.2@2920,1620 ; pad.2@3260,1620 3380,1620 pad.2@3520,1760
  Bottom Layer w7.87: v1(168.62,2605.03) 440,2605.03 ; v1(250,2452.76) 437.24,2452.76 440,2450 ; 440,2500 445.23,2505.23 v1(604.96,2505.23) 604.96,2603.93 C21.2 ; 440,2570 590,2720 C20.2 623.74,2746.26 v1(670,2700) ; R15.1 579.96,1401.81 R12.1 579.96,1679.96 v1(600,1700) ; v1(1020,2110) v1(1020,2190) ; v1(1190,470) 1213.15,446.85 R13.1 1350.74,297.59 R14.1 ; v1(1210,1930) 1270,1930 ; 1270,2280 1271.85,2278.15 v1(1365,2278.15) ; 1270,2326.38 1270,2346.3 1311.85,2388.15 v1(1311.85,2471.85) ; U7.4 1890.28,1770.71 C8.1 ; D7.1 1657.01,2191.14 U7.2 1723.46,1970 1815.94,1970 C9.2 1988.78,2051.22 1990,2050 ; v1(1947.8,2092.48) 1990,2092.48 ; v1(1949.42,2439.42) 1989.42,2439.42 1996.18,2446.18 2052.04,2446.18 ; v1(1950.33,2004.04) 1952.72,2001.65 1990,2001.5 ; 1983.82,1763.82 1990,1770 ; 1990,1919.86 v1(2130,1920.08) 2110.1,1920.08 C116.2 ; 1990,2160 v1(2210,2160) ; C115.2 2210,2220.96 v1(2210,2160) ; C117.2 2263.76,2269.39 v1(2263.76,2200) 2263.76,2173.76 2250,2160 v1(2210,2160) ; pad.2@2446.85,1623.15 C4.2 2513.73,1796.37 v1(2513.73,1860) ; v1(2634.65,1103.15) 2702.07,1035.73 v1(2925.73,1035.73) 3040,1150 3040,1620 ; v1(2745.55,2480) v1(2790,2480) ; 3000,1630 3010,1620 ; v1(3239.02,1760.98) 3291.57,1760.98 C11.2 3294.41,1654.41 pad.2@3260,1620 ; v1(3347.56,2857.56) 3451.82,2857.56 3471.03,2838.35 3628.35,2838.35 3650,2860 ; v1(3411.5,2026.33) v1@3413.18,2026.33 ; C10.2 3446.85,2060 v1@3413.18,2026.33 ; pad.2@3520,1760 pad.2@3540,1780 ; P4.3 3530,3360 3650,3240 ; v1(3589.45,3156.85) 3646.85,3156.85 3650,3160 3790,3160 P3.4 ; 3630,1870 3727.05,1772.95 v1(3727.05,1720.72) 3770.92,1676.85 C13.2 ; 3650,1950 3651.92,1951.92 3758.78,1951.92 ; 3650,2030 3646.33,2026.33 v1@3413.18,2026.33 ; 3650,2260 P2.2 ; v1(3726.85,1826.85) 3726.85,1920 3758.78,1951.92 ; C14.2 3758.78,1951.92
  Bottom Layer w39.37: pad.2@440,1937.05 440,2450 440,2500 440,2570 440,2605.03 ; pad.2@1270,1620 1270,1930 1270,2280 1270,2326.38 ; pad.2@1601.81,1620 1657.01,1675.2 ; U7.4 1657.01,1675.2 ; pad.2@1712.2,1620 1657.01,1675.2 ; 1989.42,2439.42 1989.42,2387.12 1990,2386.54 1990,2160 1990,2092.48 1990,2050 1990,2001.5 1990,1770 pad.2@1990,1620 ; pad.2@2200,1620 pad.2@2450,1620 ; pad.2@2920,1620 3010,1620 3040,1620 pad.2@3260,1620 ; pad.2@3540,1780 3630,1870 3650,1890 3650,1950 3650,2030 3650,2260 3650,2860 3650,3160 3650,3240
VGA_B: P5.3 R39.1 | length 833.4
  Top Layer w7.87: R39.1 v1(2100.05,2880) ; v1(2160,2940) 2241.26,3021.26 2587.77,3021.26 P5.3
  Bottom Layer w7.87: v1(2100.05,2880) v1(2160,2940)
VGA_B0: R39.2 U1.13
VGA_G: P5.2 R37.1 R38.1 | length 814.2
  Top Layer w7.87: R38.1 R37.1 2329.37,2805.59 v1(2360,2836.22) ; v1(2360,2920) 2514.84,2920 2610.84,3016.01 2672.52,3016.01 P5.2
  Bottom Layer w7.87: v1(2360,2836.22) v1(2360,2920)
VGA_G0: R37.2 U1.15
VGA_G1: R38.2 U1.14 | length 11.8
  Top Layer w7.87: R38.2@2219.62,2655.4 R38.2@2227.95,2647.07
VGA_HSYNC: P5.13 Q1.3 R43.2 | length 1249.8
  Top Layer w7.87: Q1.3 2700.96,2836.22 R43.2 2647.81,2901.18 2734.17,2987.54 2824.04,2987.54 2947.36,3110.86 2947.36,3151.47 2899.22,3199.61 2647.39,3199.61 2620.81,3226.19 2620.81,3281.19 2576.12,3325.88 2576.12,3371.45 2593.97,3389.29 2666.12,3389.29 P5.13
VGA_R: P5.1 R35.1 R36.1 | length 694.6
  Top Layer w7.87: R36.1 2444.46,2767.04 R35.1 2558.7,2826.44 2576.82,2844.57 2584.68,2844.57 2610.84,2870.73 2610.84,2965.89 2647.18,3002.23 2748.74,3002.23 P5.1
VGA_R0: R35.2 U1.17
VGA_R1: R36.2 U1.16
VGA_VSYNC: P5.14 Q2.3 R44.2 | length 846.4
  Top Layer w7.87: P5.14 2665.81,3299.61 2854.22,3299.61 2978.32,3175.51 R44.2 2915.39,2826.44 Q2.3
VIDEO: J2.2B S7.2 | length 1072.9
  Top Layer w7.87: J2.2B 614.45,3244.45 720.79,3350.79 731.3,3350.79 1226.42,3350.79 1275.64,3400 S7.2
VIDEO_FPGA: R23.2 R24.2 R25.2 S7.1 | length 1070
  Top Layer w7.87: S7.1 1346.1,3301.57 1395.32,3350.79 1459.21,3350.79 1460,3350 1467.2,3350 1647.2,3170 ; R23.2 1311.85,3095.15 1311.85,3148.99 1332.86,3170 1550,3170 ; R24.2 1515.47,3135.47 1550,3170 ; R25.2 1716.85,3100.35 1647.2,3170 ; 1550,3170 1647.2,3170
VIDEO_FPGA_1: R23.1 U1.20 | length 1561.8
  Top Layer w7.87: R23.1 1418.15,3081.92 1418.15,3045 1446.93,3016.22 1820.22,3016.22 2010,2826.44 2010,2624.85 2305.83,2329.03 U1.20
VIDEO_FPGA_2: R24.1 U1.19 | length 1360.2
  Top Layer w7.87: R24.1 1621.77,3076.72 1668.49,3030 1832.44,3030 2026.22,2836.22 2026.22,2631.48 2325.51,2332.18 U1.19
VIDEO_FPGA_3: R25.1 U1.18 | length 1188.9
  Top Layer w7.87: R25.1 1823.15,3076.72 2040,2859.87 2040,2640 2345.2,2334.8 U1.18
VIDEO_UC: R18.2 R19.2 R20.2 R21.2 R22.2 S7.3 | length 3624.9
  Top Layer w7.87: S7.3 1346.1,3498.43 1395.32,3449.21 1440.79,3449.21 1645.55,3244.45 1904.45,3244.45 2185,3525 3025,3525 3080,3470 v1(3080,2605.03) ; v1(3160,2436.85) 3212.13,2488.98 R18.2 R19.2 R20.2 R21.2 R22.2
  Bottom Layer w7.87: v1(3080,2605.03) 3080,2516.85 v1(3160,2436.85)
VIDEO_UC_1: R18.1 U2.37 | length 504.5
  Top Layer w7.87: R18.1 3442.99,2204.65 U2.37
VIDEO_UC_2: R19.1 U2.36 | length 476.8
  Top Layer w7.87: R19.1 3474.49,2271.57 U2.36
VIDEO_UC_3: R20.1 U2.35 | length 449.1
  Top Layer w7.87: R20.1 3505.98,2338.5 U2.35
VIDEO_UC_4: R21.1 U2.34 | length 440.2
  Top Layer w7.87: U2.34 3537.48,2359.92 R21.1
VIDEO_UC_5: R22.1 U2.33 | length 589.4
  Top Layer w7.87: U2.33 3650,1886.96 3710,1946.96 3710,2331.34 R22.1
pads on no net: P1.4 P3.7 P3.8 P5. P5.4 P5.11 P5.12 P5.15 S1.0 S1.3 S2.0 S2.3 S3.0 S3.3 S4.0 S4.3 S5.0 S5.3 S6.0 S6.3 U1.7 U2.7 U2.25 U2.30 U2.31 U2.32 U2.42 U2.43 U3.21 U3.22 U3.23 U3.24 U3.26 U3.27 U3.28 U3.29 U3.30 U3.32 U3.33 U3.34 U3.36 U3.40 U3.41 U3.43 U3.44 U3.45 U3.46 U3.48 U3.52 U3.53 U3.57 U3.58 U3.59 U3.60 U6.2 U6.4

## Polygon pours and split planes (outlines as drawn)
no net on Top Layer "DGND" (solid, pour order 2): 6130,1710

## Silkscreen, mask and mechanical layers (free items; w line width, h text height)
Top Overlay:
  text "1" at 3750,2100 h36 r270
Bottom Overlay:
  region: 1565 vertices and 1 holes, not listed, extent 149,369 1829,3409
Mechanical 9:
  the board outline again, w7.87

## Text inside footprints (layer, text, board x,y; h text height)
J1: Mechanical 1 "Mech 2 - Clearance, move to internal plane if present" at 511.88,3183.01 h11.81 r90; Mechanical 1 "Mech 1 - Slot cut-out" at 492.2,3183.01 h11.81 r90; Mechanical 1 "Assign keep-out area to slot" at 433.14,3183.01 h11.81 r90; Mechanical 1 "Slot 1.2x2.2mm, PTH" at 472.51,3183.01 h11.81 r90; Mechanical 1 "Alert PCB fab to slot details" at 452.83,3183.01 h11.81 r90; Mechanical 1 "PCB Edge" at 943.37,3565.82 h9.84 r180
J2: Mechanical 1 "Mech 2 - Clearance, move to internal plane if present" at 27.63,3183.01 h11.81 r90; Mechanical 1 "Mech 1 - Slot cut-out" at 7.95,3183.01 h11.81 r90; Mechanical 1 "Assign keep-out area to slot" at -51.11,3183.01 h11.81 r90; Mechanical 1 "Slot 1.2x2.2mm, PTH" at -11.74,3183.01 h11.81 r90; Mechanical 1 "Alert PCB fab to slot details" at -31.42,3183.01 h11.81 r90; Mechanical 1 "PCB Edge" at 459.12,3565.82 h9.84 r180
P3: Top Overlay "10" at 3818.15,2827.72 h50 r270; Top Overlay "9" at 3719.72,2827.72 h50 r270; Top Overlay "2" at 3818.15,3414.33 h50 r270; Top Overlay "1" at 3719.72,3402.52 h50 r270